# Altium PCB tay cam.PcbDoc
Units mil, origin at the board's own origin, x right, y up, seen from the top; angles counter-clockwise.
Board outline 8245 x 11534 mil, 2 copper layers (Top Layer, Bottom Layer); 14 components, 11 nets, 59 pads, 2 vias.
Unrouted connection lines stored in the file: 1.
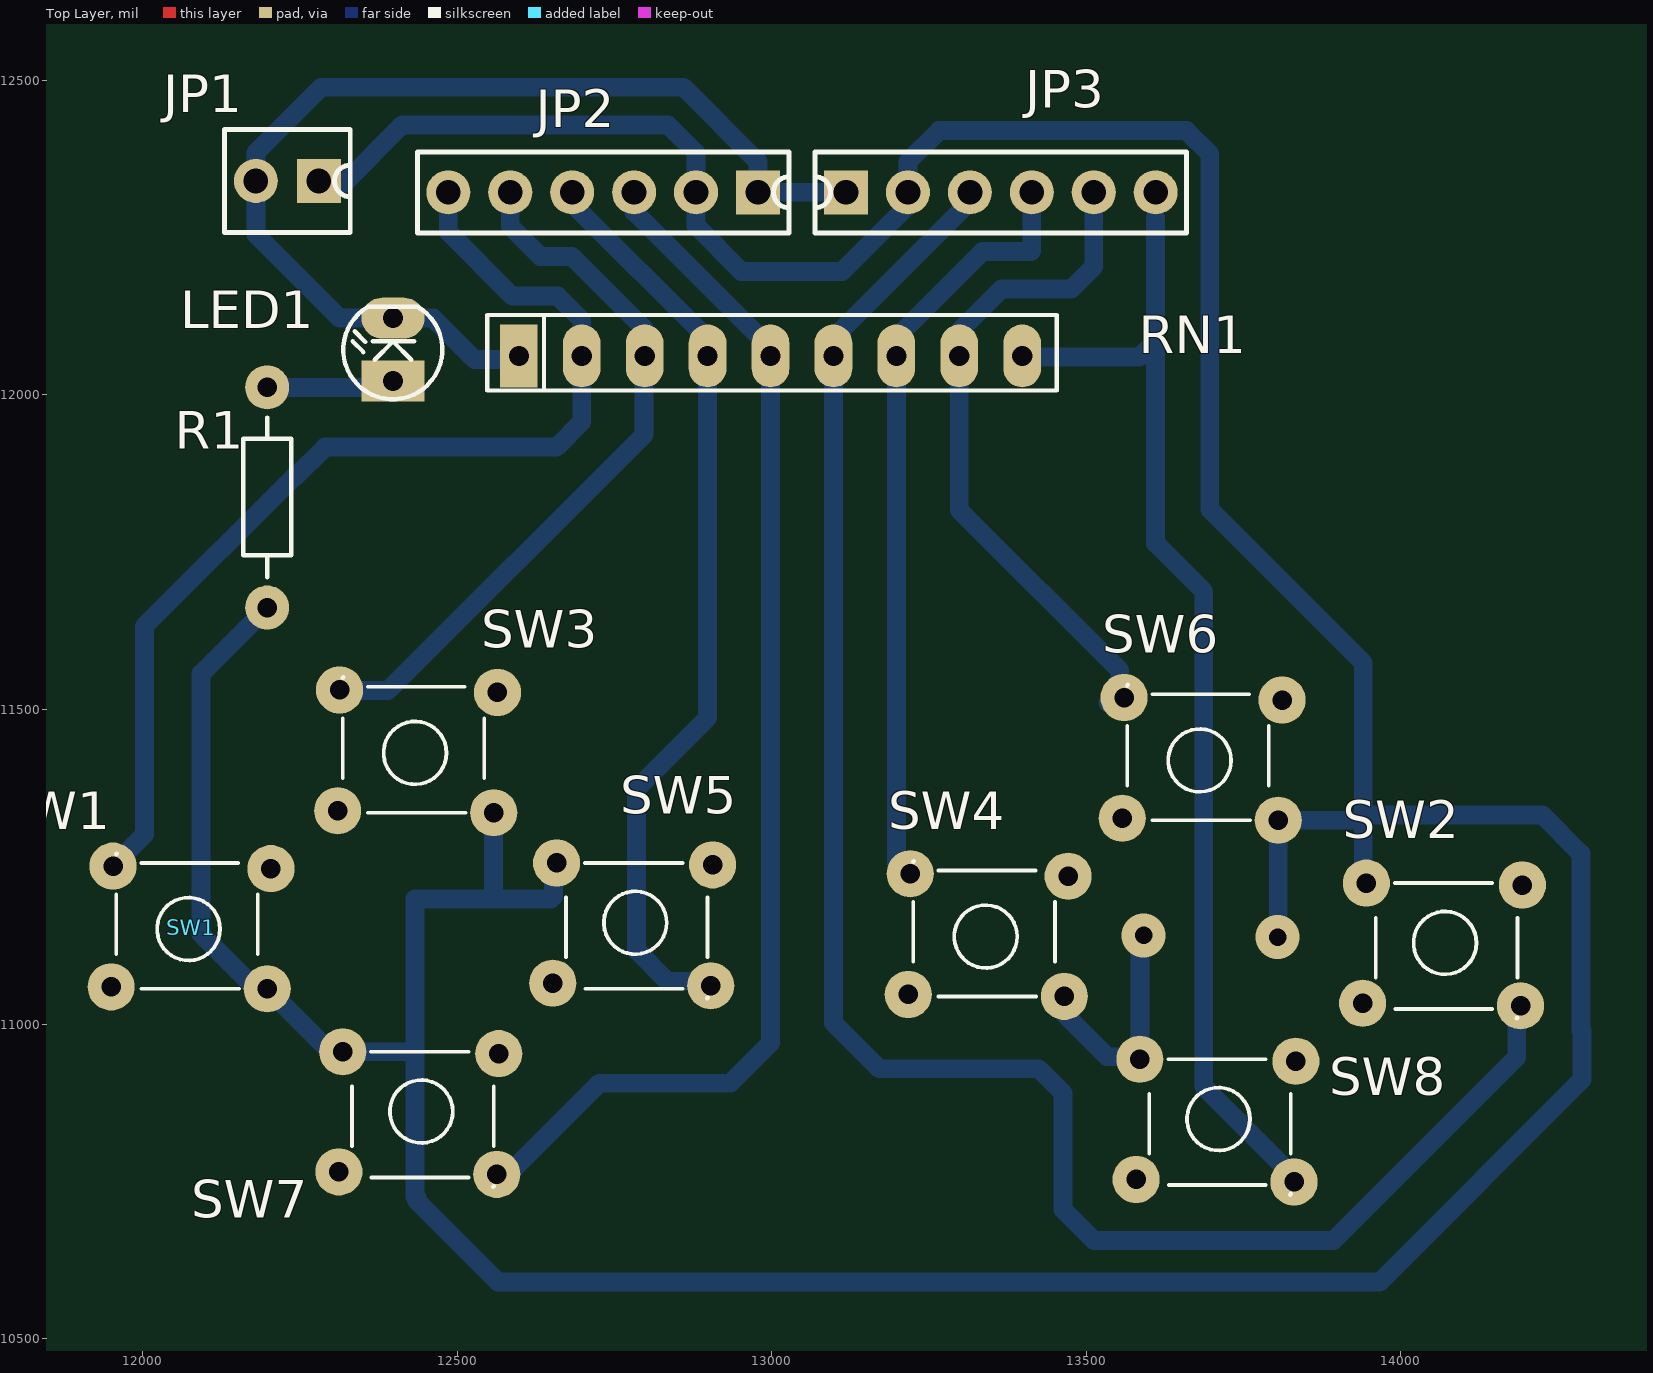
[diagram p0: Top Layer view]
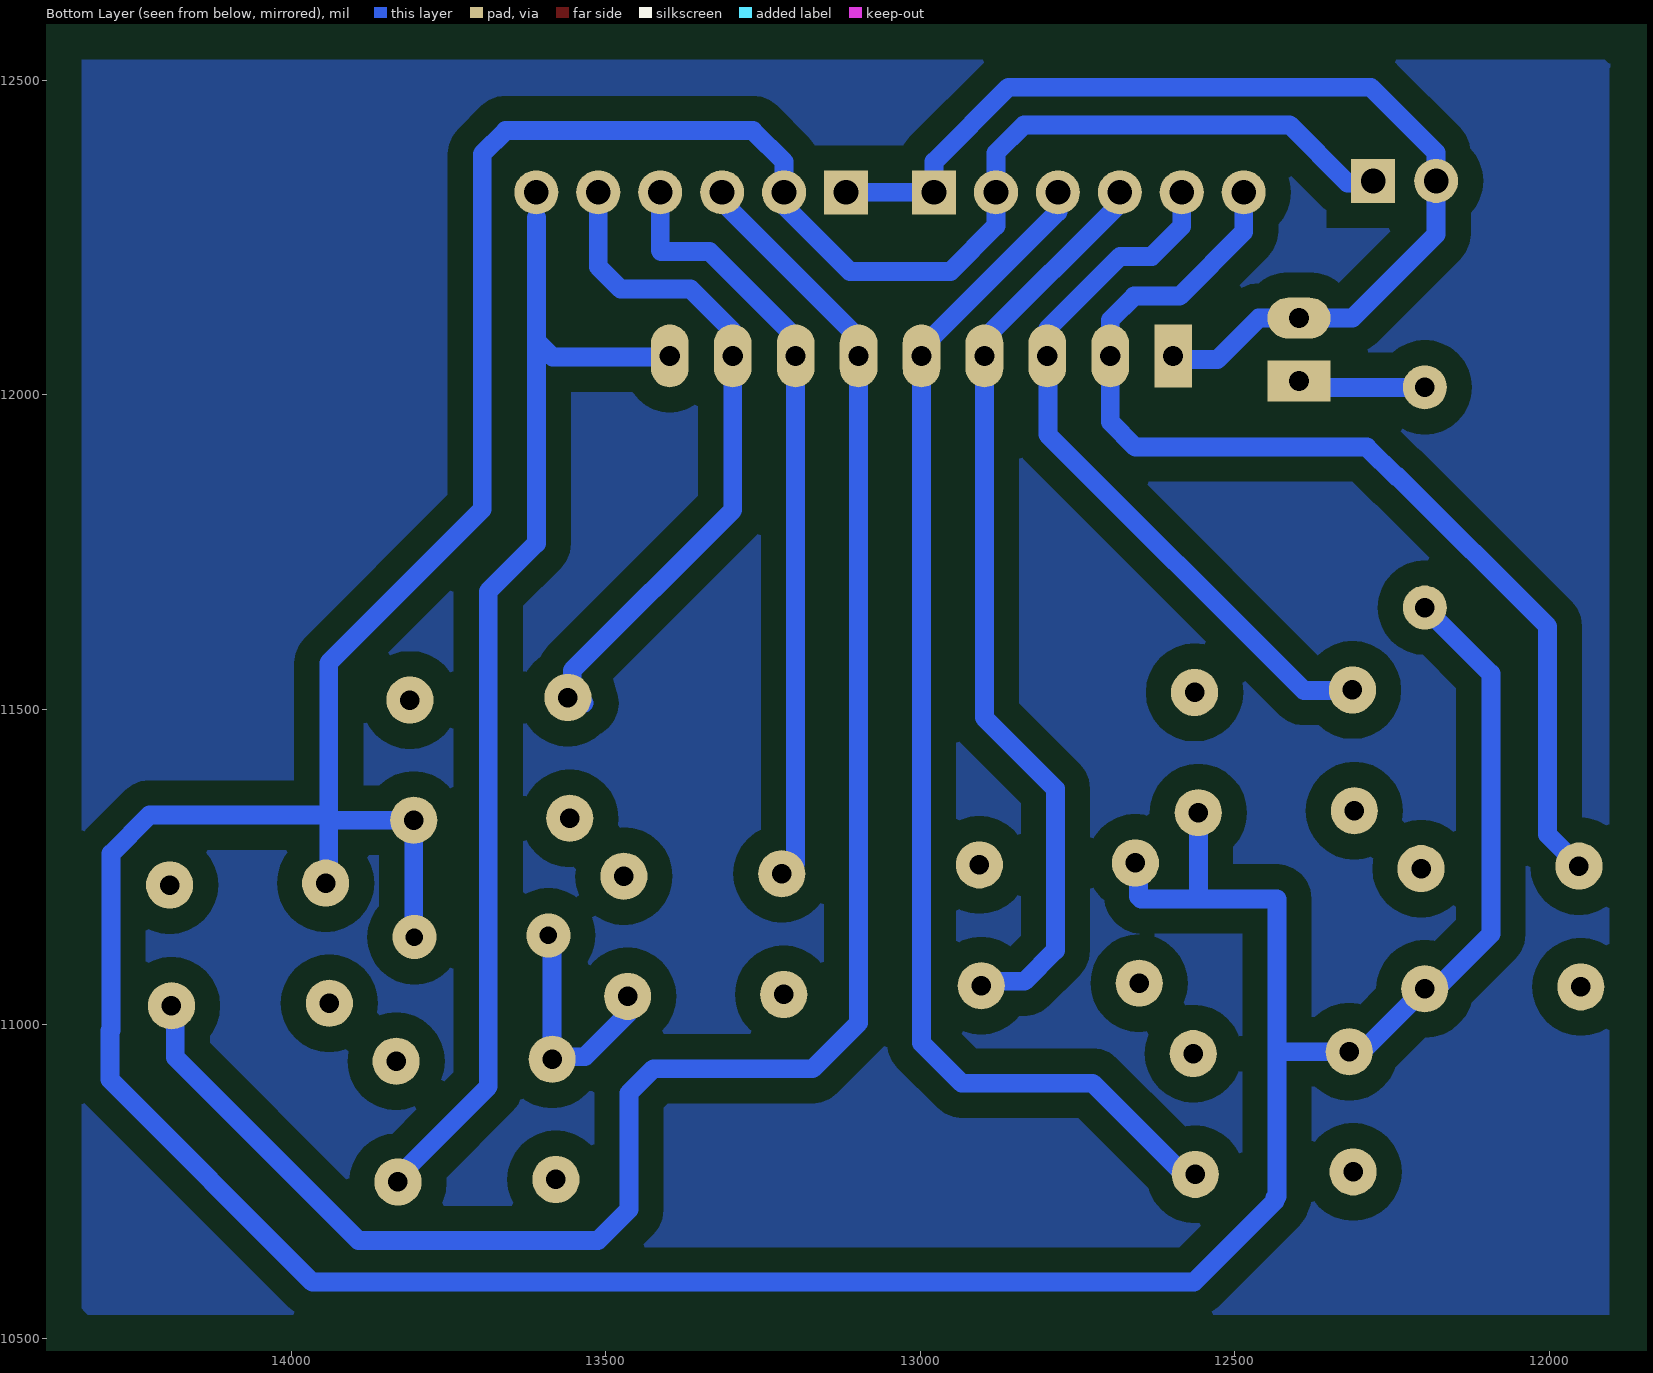
[diagram p1: Bottom Layer view, seen from below]

## Layer stack, top to bottom
Top Layer: signal copper 1.4
Dielectric: dielectric 12.6, FR-4, Dk 4.8
Bottom Layer: signal copper 1.4

## Board outline
8895,14753 8926,14784 17078,14784 17078,3312 17047,3281 17043,3285 8833,3285 8895,3347 8895,14815

## Design rules (kind name [scope] priority, off if disabled: settings)
Clearance [All] p1: gap=40
PolygonConnect [All] p1: connectstyle=Relief reliefconductorwidth=10 reliefentries=4 polygonreliefangle="90 Angle"
RoomDefinition "tay cam" [InComponentClass('tay cam')] p1: confinementstyle=ConfineIn formatcopy=TRUE lockcomponents=FALSE outline 7045,960 10990,960 10990,1985 7045,1985
RoutingVias [All] p1: holewidth=28 width=50 viastyle="Through Hole" minholewidth=28 minwidth=50 maxholewidth=28 maxwidth=50
SilkscreenOverComponentPads [All] p1: minsilkscreentomaskgap=10
SolderMaskExpansion [All] p1: expansion=4
Width [All] p1: maxlimit=30 minlimit=30 preferedwidth=30
27 further rules are at their usual default settings.

## Components (designator, comment, footprint, x,y, rotation, side; value= is the part's Value field where it differs from the comment)
JP1 "JP2" CON2 12280,12340 r270 top
JP2 "JP6" CON6#1 12978,12322 r270 top
JP3 "JP6" CON6#2 13118,12322 r270 top
LED1 "LED" LED-3 12398,12022 r90 top
R1 "1k" R1/4W 12198,11662 r90 top
RN1 "10K" RN8 12598,12062 r0 top
SW1 "SW" SW4 12198,11056 r180 top
SW2 "SW" SW4 13945,11224 r0 top
SW3 "SW" SW4 12558,11336 r180 top
SW4 "SW" SW4 13465,11044 r180 top
SW5 "SW" SW4 12658,11256 r0 top
SW6 "SW" SW4 13805,11324 r180 top
SW7 "SW" SW4 12318,10956 r0 top
SW8 "SW" SW4 13585,10944 r0 top

## Footprints (in the part's own frame and the unit in brackets; to place one, negate y for a bottom-side part, rotate by r counter-clockwise, add the part's x,y. Pads: shape width x height; smd on the part's side, far side on the other; paste and mask are expansions set on the pad)
CON2 [mil]
  rect 70x70 hole 39.37 unplated: 1(0,0)
  round 70 hole 39.37 unplated: 2(0,-100)
  silkscreen extent -82,-150 82,50
CON6#1 [mil]
  rect 70x70 hole 39.37 unplated: 1(0,0)
  round 70 hole 39.37 unplated: 2(0,-98.43) 3(0,-196.85) 4(0,-295.28) 5(0,-393.7) 6(0,-492.13)
  silkscreen extent -64,-541 64,49
CON6#2 [mil]
  rect 70x70 hole 39.37 unplated: 1(0,0)
  round 70 hole 39.37 unplated: 2(0,98.43) 3(0,196.85) 4(0,295.28) 5(0,393.7) 6(0,492.13)
  silkscreen extent -64,-49 64,541
LED-3 [mil] "LED 2 PIN, 3ly Only colour"
  rect 65x100 hole 32: 1(0,0)
  oval 65x100 hole 32: 2(100,0)
  silkscreen extent -29,-78 118,79, body extent -13,-75 125,75, height 217
R1/4W [mil] "R 1/4W, 2 Pin, 350mil"
  round 70 hole 31: 1(0,0) 2(350,0)
  silkscreen extent 48,-38 302,38, body extent -40,-47 386,47, height 111
RN8 [mil] "R SIP8, 9 Pin"
  rect 60x100 hole 32: 1(0,0)
  oval 60x100 hole 32: 2(100,0) 3(200,0) 4(300,0) 5(400,0) 6(500,0) 7(600,0) 8(700,0) 9(800,0)
  silkscreen extent -50,-55 855,65, body extent -43,-44 843,5, height 259
SW4 [mil] "SW button 4pin, 250 x250 mil"
  round 75 hole 31: 1(0,0) 2(245,-195) 3(248,-3) 4(-6,-191)
  silkscreen extent 15,-215 240,0, body extent -36,-220 276,24, height 276

## Part data
JP1: library part Con2, "Connector 2"
JP2 JP3: library part Con6, "Connector 6"
LED1: "LED Single colour Green and Red"
R1: library part R1/4W, "Resistor 1/4W"
RN1: library part RN8, "Resistor 8 (Thanh)"
SW1 SW2 SW3 SW4 SW5 SW6 SW7 SW8: library part SW2, "Switch button 2 pin"

## Via types
v1: diameter 70, hole 28, Top Layer to Bottom Layer, 2 vias

## Nets (pads, with @x,y where several pads share a name; then routed paths per layer and width w, separated by ;. In a path a pad name is that pad's centre, name@x,y a point inside that pad or via, vN(x,y) a via of type N, cw(c..) or ccw(c..) an arc to the next point about the centre after c; other vN are vias at no path point)
1: JP2.3 RN1.5 SW7.2 | length 1948.9
  Bottom Layer w30: SW7.2@12575,10767 12579,10771 12591,10771 12726,10906 12934,10906 12998,10970 12998,11309 RN1.5 12998,12073.92 12781.15,12290.77 JP2.3
2: JP2.4 RN1.4 SW5.2 | length 2037.3
  Bottom Layer w30: JP2.4 12682.72,12304.13 12898,12088.85 RN1.4 ; 12898,11502 RN1.4 ; SW5.2@12901,11068 12834,11068 12785,11117 12785,11374 12898,11487 RN1.4
3: JP2.5 RN1.3 SW3.2 | length 1166.4
  Bottom Layer w30: SW3.2@12312,11530 12390,11530 12797,11937 RN1.3@12797,12072 ; JP2.5 12584.3,12267.7 12632,12220 12682,12220 12798,12104 RN1.3
4: JP2.6 RN1.2 SW1.2 | length 1727.9
  Bottom Layer w30: SW1.2@11955,11251 SW1.2 12003,11301 12003,11632 12241,11870 ; 12242,11869 12290,11917 12658,11917 12698,11957 RN1.2 12698,12119 12660,12157 12587.85,12157 12485.87,12258.98 JP2.6
5: JP3.3 RN1.6 SW2.2 | length 2956
  Bottom Layer w30: JP3.3 13314.85,12306.85 13098,12090 RN1.6 13098,11002 13171,10929 13424,10929 13463,10890 13463,10705 13512,10656 13893,10656 14184,10947 SW2.2@14184,11018 ; SW2.2@14199,11012 SW2.2@14199,11029
6: JP3.4 RN1.7 SW4.2 | length 1218.2
  Bottom Layer w30: SW4.2@13210,11243 13198,11255 RN1.7 13198,12091 13335,12228 13412,12228 13413.28,12229.28 JP3.4
7: JP3.5 RN1.8 SW6.2 | length 1076.2
  Bottom Layer w30: JP3.5 13511.7,12203.7 13476,12168 13365,12168 13298,12101 RN1.8 13298,11817 13553,11562 SW6.2@13553,11520 ; SW6.2@13534,11510 SW6.2@13549,11510
8: JP3.6 RN1.9 SW8.2 | length 1849.8
  Bottom Layer w30: RN1.9 13400,12060 13584,12060 13610.13,12086.13 ; 13610.13,12282 13610.13,12086.13 ; SW8.2@13837,10750 13686.5,10900.5 13686.5,11687.5 13610.13,11763.87 13610.13,12086.13
GND: JP1.2 JP2.1 JP3.1 LED1.2 RN1.1 | length 1716
  Bottom Layer w30: LED1.2@12395,12119 LED1.2 ; RN1.1 12592,12056 12528,12056 12462,12122 12405,12122 LED1.2 ; JP3.1 JP2.1 12978,12370.85 12859.85,12489 12284,12489 12282,12487 12280,12485 12180,12385 JP1.2 12180,12255 12313,12122 LED1.2
NetLED1_1: LED1.1 R1.2 | length 204.1
  Bottom Layer w30: R1.2 12388,12012 LED1.1
VCC: JP1.1 JP2.2 JP3.2 R1.1 SW1.1 SW2.1 SW3.1 SW4.1 SW5.1 SW6.1 SW7.1 SW8.1 | length 8387.1
  Bottom Layer w30: SW1.1@12179,11057 12093,11143 12093,11557 R1.1 ; SW1.1 12303,10951 SW7.1@12321,10951 ; JP1.1 JP1.1@12290,12340 ; JP1.1@12290,12337 12321,12337 12413,12429 12835,12429 12879.57,12384.43 JP2.2 12879.57,12268.43 12952,12196 13111.5,12196 13216.43,12300.93 JP3.2 13216.43,12370.43 13266,12420 13659,12420 13696,12383 13696,11818 13940,11574 13940,11225 SW2.1@13937,11222 ; SW7.1 12427,10956 ; 12435,10724 12433,10726 12433,11199 12649,11199 12653,11203 SW5.1@12653,11244 ; 12436,10724 12436,10719 12565,10590 13966,10590 14288,10912 14288,10990 ; 12558,11208 SW3.1 ; SW5.1@12670,11244 SW5.1@12670,11248 ; SW4.1 13465,11016 13533,10948 SW8.1@13585,10948 ; SW8.1 SW8.1@13585,10948 ; v1@13586,11150 13585,11149 SW8.1@13585,10948 ; SW8.1@13601,10933 13586,10948 SW8.1@13585,10948 ; v1@13804,11147 13806,11147 13805,11148 SW6.1 ; 13848,11324 SW6.1 ; 13927,11324 SW6.1 ; 13941,11332 14225,11332 14286,11271 14286,10990 ; SW2.1@13944,11222 SW2.1@13944,11226
  other v1: 13804,11138 13591,11141
pads on no net: SW1.3 SW1.4 SW2.3 SW2.4 SW3.3 SW3.4 SW4.3 SW4.4 SW5.3 SW5.4 SW6.3 SW6.4 SW7.3 SW7.4 SW8.3 SW8.4

## Polygon pours and split planes (outlines as drawn)
no net on Bottom Layer "Bottom Layer-No Net" (solid): 11907,12528 11912,12533 14333,12533 14333,10548 14328,10543 14323,10538 11905,10538 11905,12519 11900,12524